# Altium PCB CC1101_DoorState.PcbDoc
Units mm, origin at the board's own origin, x right, y up, seen from the top; angles counter-clockwise.
Board outline 30.48 x 64.39 mm, 2 copper layers (Top Layer, Bottom Layer); 22 components, 20 nets, 74 pads, 10 vias.
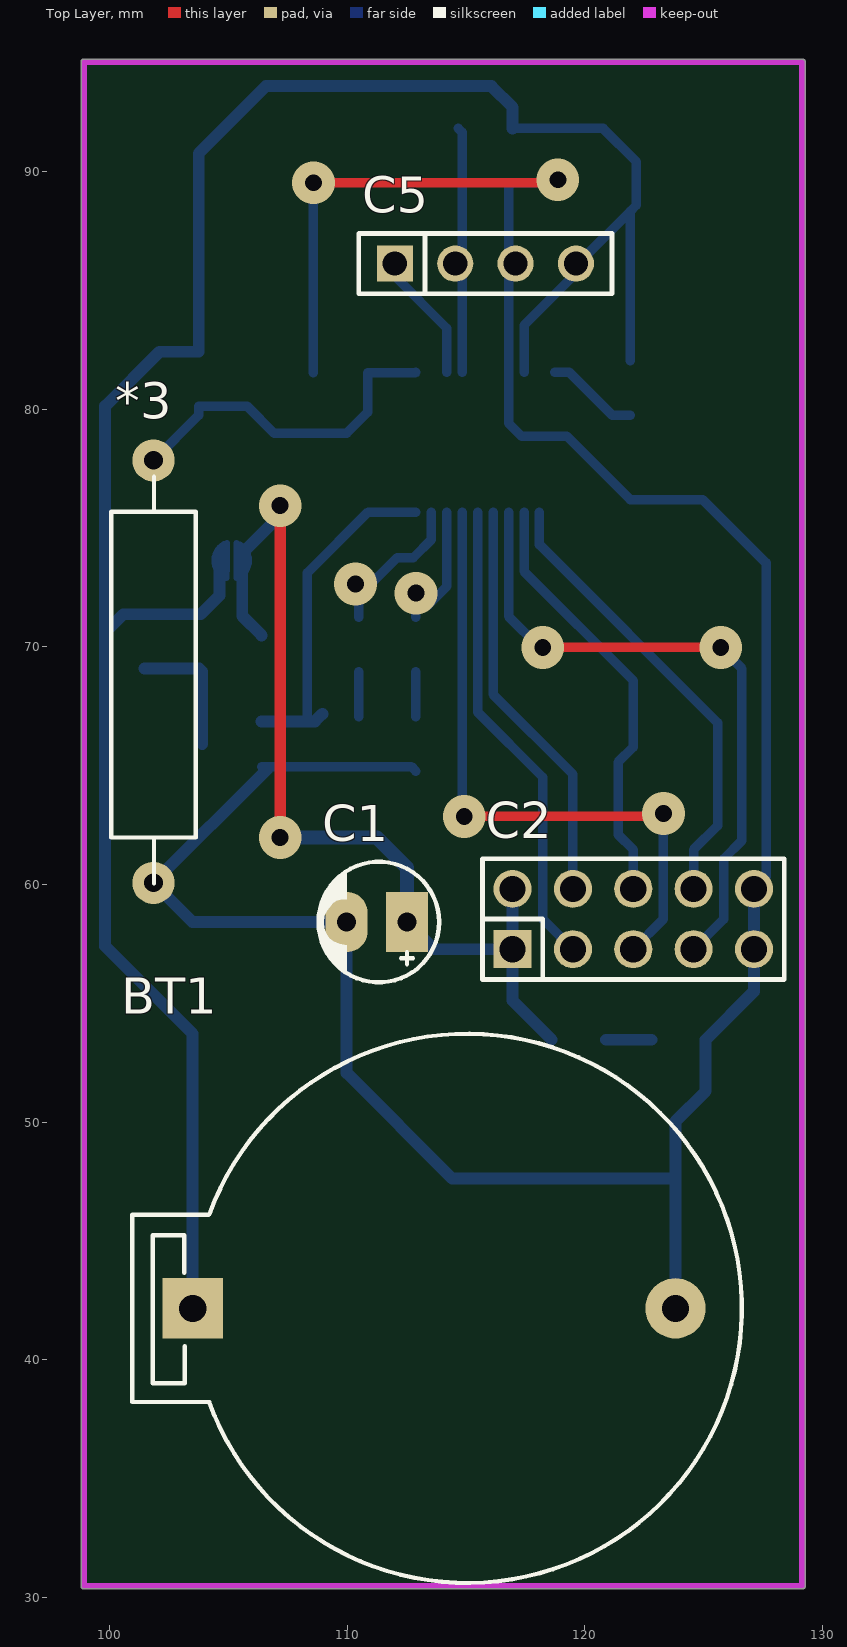
[diagram p0: Top Layer view]
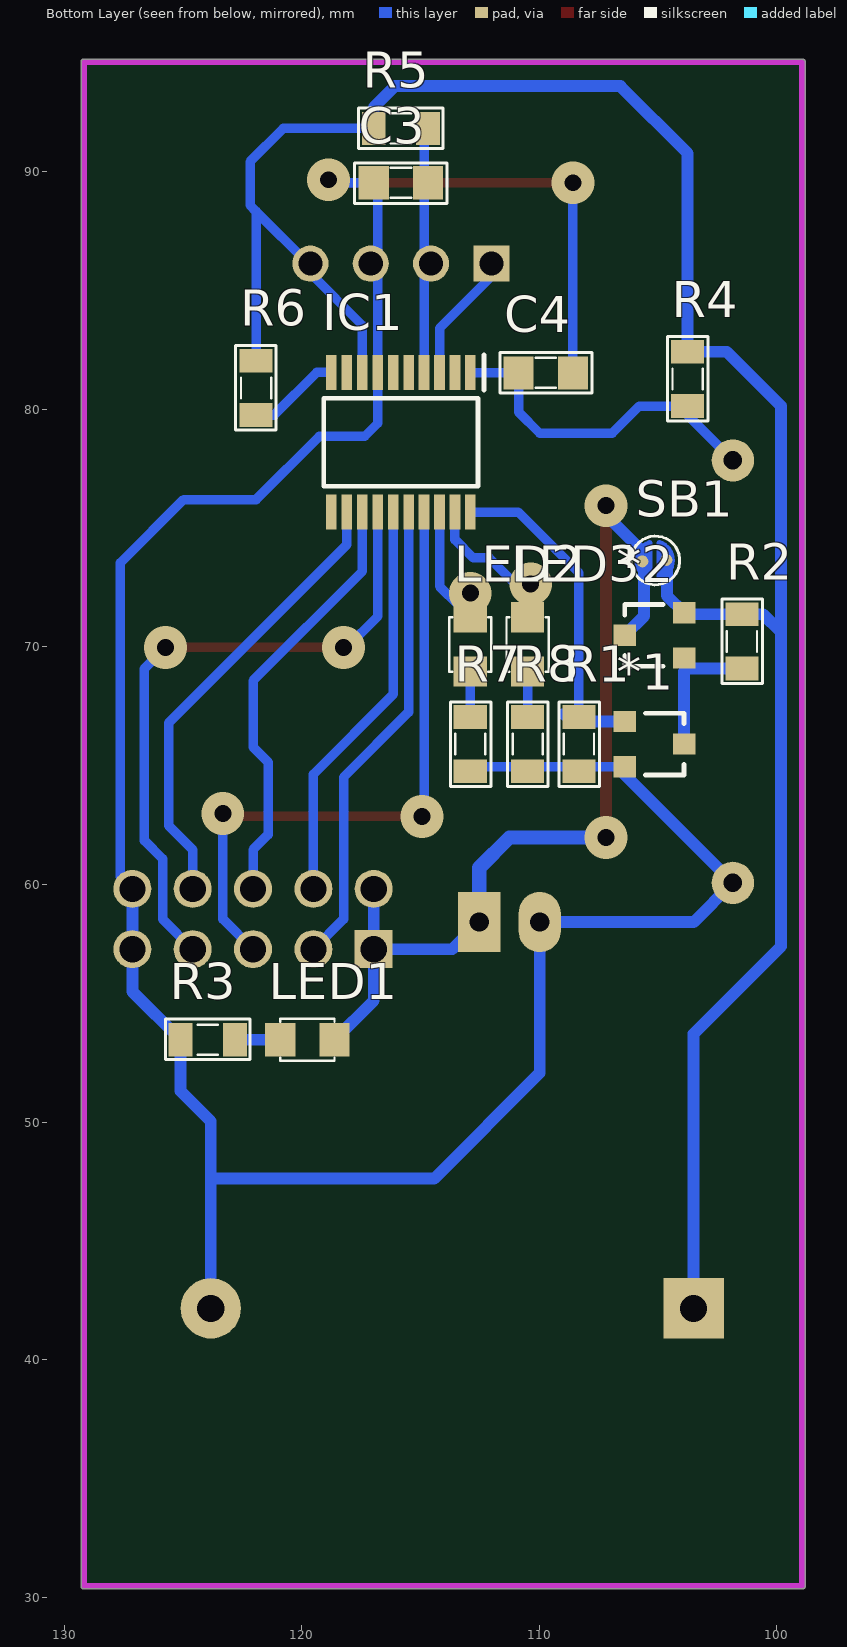
[diagram p1: Bottom Layer view, seen from below]
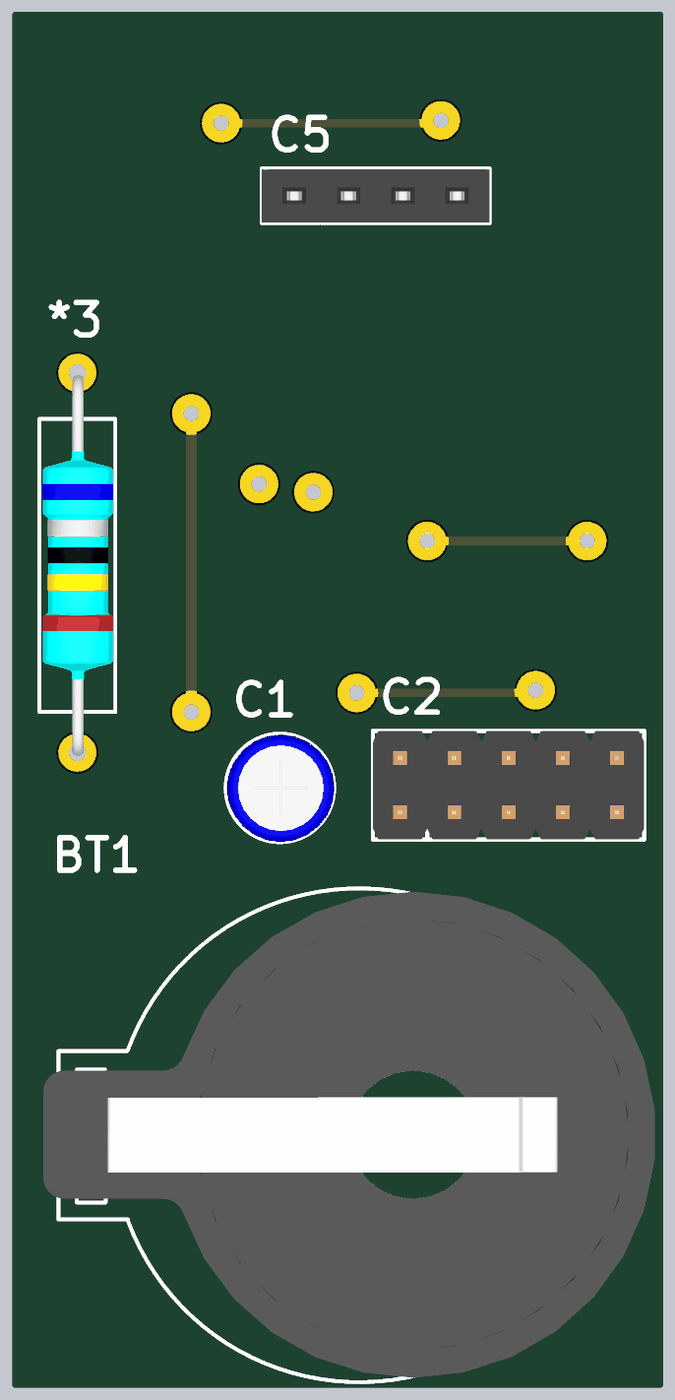
[diagram p2: 3D render of the assembled board from above, using the file's embedded part models]
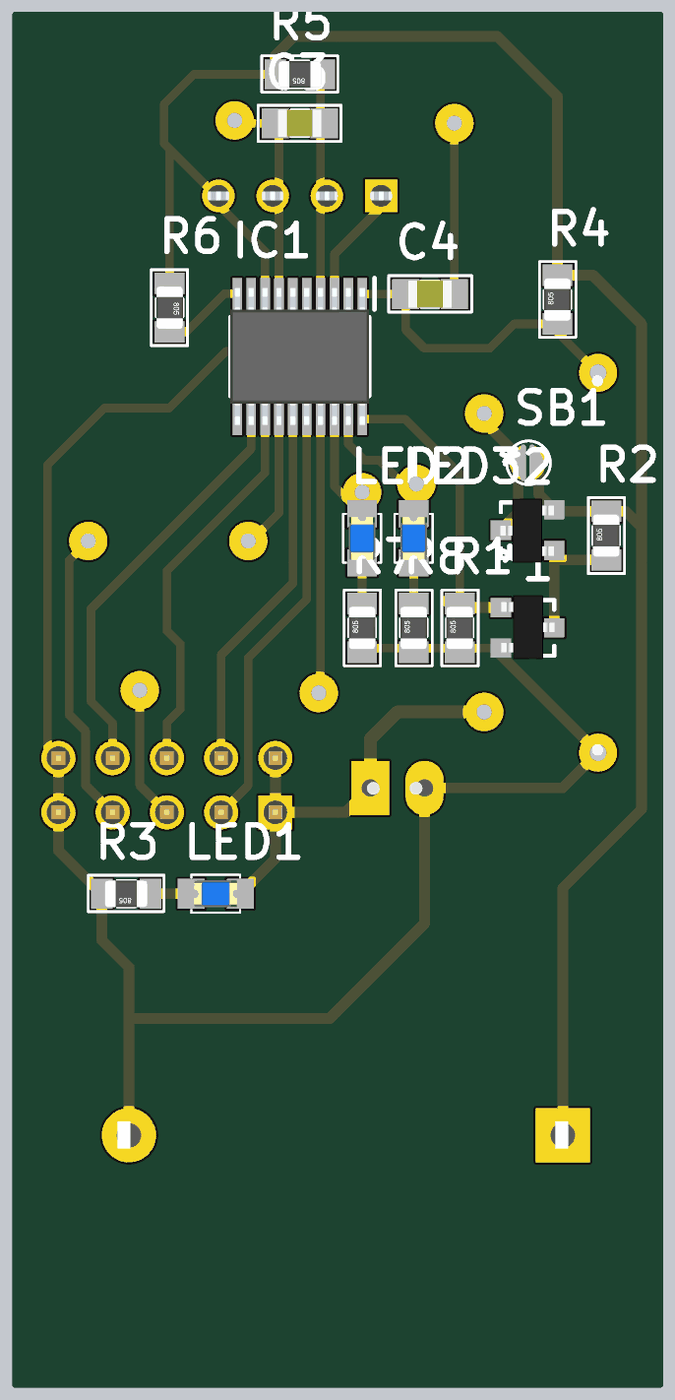
[diagram p3: 3D render of the assembled board from below, using the file's embedded part models]

## Layer stack, top to bottom
Top Solder: solder mask 0.0102, Solder Resist, Dk 3.5
Top Layer: signal copper 0.0356
Dielectric 1: dielectric 0.32, FR-4, Dk 4.8
Bottom Layer: signal copper 0.0356
Bottom Solder: solder mask 0.0102, Solder Resist, Dk 3.5

## Board outline
98.806,30.48 ccw(c98.933,30.48) 98.933,30.353 129.159,30.353 ccw(c129.159,30.48) 129.286,30.48 129.286,94.615 ccw(c129.159,94.615) 129.159,94.742 98.933,94.742 ccw(c98.933,94.615) 98.806,94.615

## Design rules (kind name [scope] priority, off if disabled: settings)
Clearance [All] p1: gap=0.2 ignorepadtopadclearanceinfootprint=FALSE
PolygonConnect [All] p1: connectstyle=Relief reliefconductorwidth=0.254 reliefentries=4 polygonreliefangle="90 Angle" airgapwidth=0.254
RoutingVias [All] p1: holewidth=0.711 width=1.8 viastyle="Through Hole" minholewidth=0.711 minwidth=1.8 maxholewidth=0.711 maxwidth=1.8
SolderMaskExpansion [All] p1: expansion=0.102
Width [All] p1: maxlimit=0.6 minlimit=0.4 preferedwidth=0.5
30 further rules are at their usual default settings.

## Components (designator, comment, footprint, x,y, rotation, side; value= is the part's Value field where it differs from the comment)
*1 "AO3400" SOT23-123 105.156,65.913 r270 bottom
*2 "AO3401" SOT23-123 105.156,70.485 r90 bottom
*3 "SW_Magnetic" SW_Magnetic 96.52,79.756 r270 top
BT1 "PIN 3V" PIN3V 103.505,42.164 r0 top
C1 "10uF" CP1/2 112.522,58.42 r180 top value=10uF/50V
C2 "JP5x2" JP5-D2T 122.047,58.547 r0 top
C3 "104" SM-0805 115.824,89.535 r180 bottom value=103
C4 "104" SM-0805 109.728,81.534 r0 bottom value=103
C5 "JP4" JP4-C1T 112.014,86.133 r0 top
IC1 "STM8L051F3P6" SOP65P640X120-20N 115.824,78.613 r270 bottom
LED1 "LED" SM-LED-0805-Blue 118.618,53.467 r0 bottom
LED2 "LED" SM-LED-0805-Blue 112.903,71.247 r270 bottom
LED3 "LED" SM-LED-0805-Blue 110.49,71.247 r270 bottom
R1 "100k" RES-SMD-0805 108.331,65.913 r90 bottom
R2 "100k" RES-SMD-0805 101.473,70.231 r90 bottom
R3 "1K" RES-SMD-0805 123.952,53.467 r0 bottom
R4 "500K" RES-SMD-0805 103.759,81.28 r90 bottom
R5 "500K" RES-SMD-0805 115.824,91.821 r0 bottom
R6 "100K" RES-SMD-0805 121.92,80.899 r270 bottom
R7 "1K" RES-SMD-0805 112.903,65.913 r90 bottom
R8 "1K" RES-SMD-0805 110.49,65.913 r90 bottom
SB1 "SB" SB 103.553,75.245 r0 bottom

## Footprints (in the part's own frame and the unit in brackets; to place one, negate y for a bottom-side part, rotate by r counter-clockwise, add the part's x,y. Pads: shape width x height; smd on the part's side, far side on the other; paste and mask are expansions set on the pad)
CP1/2 [mil] "Tu hoa < 22uF/16>50V"
  rect 70x100 hole 32: 1(0,0)
  oval 70x100 hole 32: 2(100,0)
  silkscreen extent -53,-100 147,100, body extent -54,-99 144,100, height 296
JP4-C1T [mm] "4 row, straight, gold plating"
  rect 1.52x1.52 hole 1.02: 1(0,0)
  round 1.52 hole 1.02: 2(2.54,0) 3(5.08,0) 4(7.62,0)
  silkscreen extent -1.52,-1.27 9.14,1.27, body extent -1.52,-1.25 9.14,1.25, height 8.51
JP5-D2T [mm] "10 pins, dual pin, straight, gold plating"
  rect 1.6x1.6 hole 1.1: 1(-5.08,-1.27)
  round 1.6 hole 1.1: 2(-2.54,-1.27) 3(0,-1.27) 4(2.54,-1.27) 5(5.08,-1.27) 6(5.08,1.27) 7(2.54,1.27) 8(0,1.27) 9(-2.54,1.27) 10(-5.08,1.27)
  silkscreen extent -6.35,-2.54 6.35,2.54, body extent -6.35,-2.54 6.35,2.54, height 8.55
PIN3V [mil] "Socket PIN 3V"
  rect 100x100 hole 45: 1(0,0)
  round 100 hole 45: 2(800,0)
  silkscreen extent -100,-455 910,455, body extent -128,-447 1002,449, height 278
RES-SMD-0805 [mil]
  rect 39.37x55 smd: 1(-45,0) 2(45,0)
  silkscreen extent -70,-34 70,33, body extent -39,-25 39,25, height 31
SB [mm]
  round 0.5 smd: 1(1.095,1.585) 2(2.105,1.645)
  Top Layer region: 0.865,1.611 0.93,1.919 1.114,2.174 1.385,2.334 1.385,2.334 1.388,0.878 1.114,1.04 0.929,1.3 0.865,1.611
  Top Layer region: 2.321,1.612 2.256,1.92 2.072,2.176 1.8,2.335 1.8,2.335 1.803,0.879 2.075,1.042 2.258,1.301 2.321,1.612
  Top Layer lines w0.254: 0.865,1.611 cw(c1.627,1.611) 1.079,2.14 cw(c1.627,1.611) 1.385,2.334 1.386,1.84 1.386,1.586 1.388,0.878 ; 0.867,1.601 ccw(c1.629,1.601) 1.388,0.878 ; 2.321,1.612 ccw(c1.559,1.612) 2.037,2.205 ccw(c1.559,1.612) 1.8,2.335 ; 2.323,1.602 cw(c1.561,1.602) 1.803,0.879 ; 1.388,0.878 1.388,0.878 ; 1.8,2.335 1.801,1.72 1.802,1.644 1.803,0.879 ; 1.8,2.335 1.8,2.335 ; 1.803,0.879 1.803,0.879
  silkscreen extent 0.54,0.58 2.58,2.63
SM-0805 [mil] "Compoment SMD 80x50mil"
  rect 50x55 smd: 1(-45,0) 2(45,0)
  silkscreen extent -77,-34 76,33, body extent -40,-25 40,25, height 24
SM-LED-0805-Blue [mil]
  rect 50x55 smd: 1(0,0) 2(90,0)
  silkscreen extent 0,-35 90,35, body extent 5,-25 85,25, height 43
SOP65P640X120-20N [mm]
  rect 1.475x0.45 smd: 1(-2.938,2.925) 2(-2.938,2.275) 3(-2.938,1.625) 4(-2.938,0.975) 5(-2.938,0.325) 6(-2.938,-0.325) 7(-2.938,-0.975) 8(-2.938,-1.625) 9(-2.938,-2.275) 10(-2.938,-2.925) 11(2.938,-2.925) 12(2.938,-2.275) 13(2.938,-1.625) 14(2.938,-0.975) 15(2.938,-0.325) 16(2.938,0.325) 17(2.938,0.975) 18(2.938,1.625) 19(2.938,2.275) 20(2.938,2.925)
  silkscreen extent -3.67,-3.25 1.85,3.5, body extent -3.2,-3.25 3.2,3.25, height 1.2
SOT23-123 [mm] "SOT23, 1=bottom-left, 2=top, 3=bottom-right"
  rect 0.9x0.95 smd: 1(-0.95,-1.25) 2(0,1.25)
  rect 0.9x0.95 smd mask+0: 3(0.95,-1.25)
  silkscreen extent -1.3,-0.38 1.3,1.25, body extent -1.52,-1.23 1.48,1.27, height 1.06
SW_Magnetic [mil]
  round 70 hole 31: 1(75,210) 2(775,210)
  silkscreen extent 102,140 776,280, body extent 79,145 781,277, height 144

## Part data
BT1: "Battery 3VDC"
C1: library part CP1, "Cap P  0,1uF < 22uF , 16 - 50V", Description 1="10 => 220uF/6,3V/10V - 10uF => 100uF/16V", Description 2="0,1uF => 33uF/50V - 10uF => 22uF/63V", Description 3="0,47uF => 10uF/100V"
C2: "WR-PHD 2.54 mm Dual Socket Header", Manufacturer="Würth Elektronik eiSos GmbH", partNo=61301021821, ComponentLink1 Description=Manufacturer, ComponentLink1URL=http://www.we-online.com, ComponentLink2 Description=Datasheet, ComponentLink2URL=http://katalog.we-online.de/em/datasheet/6130xx21821.pdf, Created by="Karrer Zheng", Created Date="29 March 2013", NoPins=10
C3 C4: library part CM, "Cap SMD"
C5: "WR-PHD 2.54 mm Angled Socket Header", Manufacturer="Würth Elektronik eiSos GmbH", partNo=613004143121, ComponentLink1 Description=Manufacturer, ComponentLink1URL=http://www.we-online.com, ComponentLink2 Description=Datasheet, ComponentLink2URL=http://katalog.we-online.de/em/datasheet/6130xx143121.pdf, Created by="Karrer Zheng", Created Date="29 March 2013", NoPins=04
IC1: "Integrated Circuit", Manufacturer_Name=STMicroelectronics, Mouser Part Number=511-STM8L051F3P6, RS Part Number=7957543P, Allied_Number=70521164, Allied Price/Stock=http://www.alliedelec.com/stmicroelectronics-stm8l051f3p6/70521164/, Datasheet Link=http://www.st.com/web/en/resource/technical/document/datasheet/DM00060484.pdf, Height=1.2mm, Manufacturer_Part_Number=STM8L051F3P6, Mouser Price/Stock=https://www.mouser.com/Search/Refine.aspx?Keyword=511-STM8L051F3P6, RS Price/Stock=http://uk.rs-online.com/web/p/products/7957543P
R1 R2 R3 R4 R5 R6 R7 R8: library part R, "Resistor R1/4W"

## Via types
v1: diameter 1.8, hole 0.711, Top Layer to Bottom Layer, 10 vias

## Nets (pads, with @x,y where several pads share a name; then routed paths per layer and width w, separated by ;. In a path a pad name is that pad's centre, name@x,y a point inside that pad or via, vN(x,y) a via of type N, cw(c..) or ccw(c..) an arc to the next point about the centre after c; other vN are vias at no path point)
CSN: C2.4 IC1.14 | length 27.8
  Top Layer w0.4: v1(118.237,69.977) v1(125.73,69.977)
  Bottom Layer w0.4: IC1.14 116.799,71.288 118.11,69.977 v1(118.237,69.977) ; C2.4 125.857,58.547 125.857,61.087 126.619,61.849 126.619,69.088 v1(125.73,69.977)
EN_POW_RF: *1.1 IC1.20 R1.2 | length 14.4
  Bottom Layer w0.4: R1.2 108.331,73.12 110.886,75.675 IC1.20
  Bottom Layer w0.5: *1.1 108.646,66.863 R1.2@108.966,67.183
GD0: C2.7 IC1.12 | length 19.4
  Bottom Layer w0.4: IC1.12 118.099,74.306 125.603,66.802 125.603,62.484 124.587,61.468 C2.7
GD2: C2.8 IC1.13 | length 18.3
  Bottom Layer w0.4: IC1.13 117.449,73.178 122.047,68.58 122.047,65.786 121.412,65.151 121.412,62.103 122.047,61.468 C2.8
GND: *1.3 *3.2 BT1.2 C1.2 C2.5 C2.6 C3.1 C4.1 C5.3 IC1.7 R1.1 R3.2 R7.1 R8.1 | length 121
  Top Layer w0.4: v1(108.585,89.535) 118.745,89.535 v1(118.872,89.662)
  Bottom Layer w0.4: *1.3 112.71,64.963 R7.1 ; C4.1 v1(108.585,89.535) ; v1(118.872,89.662) 118.745,89.535 C3.1 116.799,89.367 IC1.7 116.799,79.416 117.348,78.867 119.253,78.867 121.92,76.2 124.968,76.2 127.635,73.533 127.635,60.325 C2.6
  Bottom Layer w0.5: *1.3@106.68,64.897 *3.2 103.505,58.42 C1.2 109.982,52.07 114.427,47.625 123.698,47.625 123.825,47.498 ; BT1.2 123.825,47.498 ; C2.6 127.127,55.499 R3.2 125.095,51.308 123.825,50.038 123.825,47.498
MISO: C2.3 IC1.17 | length 27.5
  Top Layer w0.4: v1(114.935,62.865) 123.19,62.865 v1(123.317,62.992)
  Bottom Layer w0.4: IC1.17 114.849,62.951 v1(114.935,62.865) ; C2.3 123.317,58.547 v1(123.317,62.992)
MOSI: C2.2 IC1.16 | length 20.1
  Bottom Layer w0.4: IC1.16 115.499,67.254 118.237,64.516 118.237,58.547 C2.2
Net*1_2: *1.2 *2.1 R2.1 | length 5.5
  Bottom Layer w0.5: R2.1 103.779,69.088 103.906,68.961 *1.2
Net*2_2: *2.2 C1.1 C2.1 C2.10 LED1.1 SB1.2 | length 39.9
  Top Layer w0.5: v1(107.188,61.976) v1(107.188,75.946)
  Bottom Layer w0.5: SB1.2@105.59,73.525 105.59,73.04 105.59,71.301 *2.2 ; 105.735,74.097 107.188,75.55 v1(107.188,75.946) ; v1(107.188,61.976) v1@107.442,61.976 ; C1.1 113.665,57.277 C2.1 ; C2.10 116.967,55.118 LED1.1
  Bottom Layer w0.6: v1@107.442,61.976 111.252,61.976 112.522,60.706 C1.1
Net*3_1: *3.1 C4.2 IC1.1 R4.1 | length 14.7
  Bottom Layer w0.4: *3.1 103.759,79.756 R4.1 105.791,80.137 106.934,78.994 109.982,78.994 110.871,79.883 C4.2 112.882,81.534 IC1.1
NetIC1_10: IC1.10 R6.2 | length 3.9
  Bottom Layer w0.4: IC1.10 119.363,81.551 121.158,79.756 R6.2
NetIC1_18: IC1.18 LED2.1 | length 5.3
  Bottom Layer w0.4: LED2.1 v1(112.903,72.263) ; LED2.1@113.411,71.755 114.199,72.543 IC1.18
NetIC1_19: IC1.19 LED3.1 | length 6.9
  Bottom Layer w0.4: v1(110.363,72.644) 110.363,72.034 v1@110.49,71.907 ; LED3.1 v1@110.49,71.907 ; IC1.19 113.549,74.515 112.789,73.755 112.109,73.755 110.49,72.136 v1@110.49,71.907
NetLED1_2: LED1.2 R3.1 | length 1.9
  Bottom Layer w0.5: LED1.2 R3.1
NetLED2_2: LED2.2 R7.2 | length 1.9
  Bottom Layer w0.4: R7.2 LED2.2
NetLED3_2: LED3.2 R8.2 | length 1.9
  Bottom Layer w0.4: R8.2 LED3.2
NRST: C3.2 C5.2 IC1.4 R5.1 | length 10.3
  Bottom Layer w0.4: R5.1 114.849,91.653 IC1.4
SCK: C2.9 IC1.15 | length 17.2
  Bottom Layer w0.4: IC1.15 116.149,68.001 119.507,64.643 C2.9
SWIM: C5.1 IC1.3 | length 5.5
  Bottom Layer w0.4: C5.1 112.014,85.598 114.199,83.413 IC1.3
VCC: *2.3 BT1.1 C5.4 IC1.8 R2.2 R4.2 R5.2 R6.1 SB1.1 | length 98
  Bottom Layer w0.4: R5.2 120.777,91.821 122.174,90.424 122.174,88.586 121.92,88.332 ; IC1.8 117.449,83.54 119.634,85.725 C5.4 119.721,86.133 121.92,88.332 ; R6.1 121.92,88.332
  Bottom Layer w0.5: BT1.1 103.505,53.721 99.822,57.404 99.822,70.612 ; 104.632,73.406 104.632,73.105 104.632,72.161 *2.3 103.845,71.374 R2.2 100.584,71.374 99.822,70.612 ; R5.2 116.967,92.71 116.078,93.599 106.589,93.599 103.759,90.769 R4.2 102.108,82.423 99.822,80.137 99.822,70.612
pads on no net: IC1.2 IC1.5 IC1.6 IC1.9 IC1.11

## Keep-outs
Keep-Out Layer:
  lines w0.254: 98.933,30.48 98.933,94.615 129.159,94.615 129.159,30.48 98.933,30.48